# Altium PCB main.PcbDoc
Units mm, origin at the board's own origin, x right, y up, seen from the top; angles counter-clockwise.
Board outline 80 x 54.5 mm, 2 copper layers (Top Layer, Bottom Layer); 9 components, 7 nets, 32 pads, 2 vias.
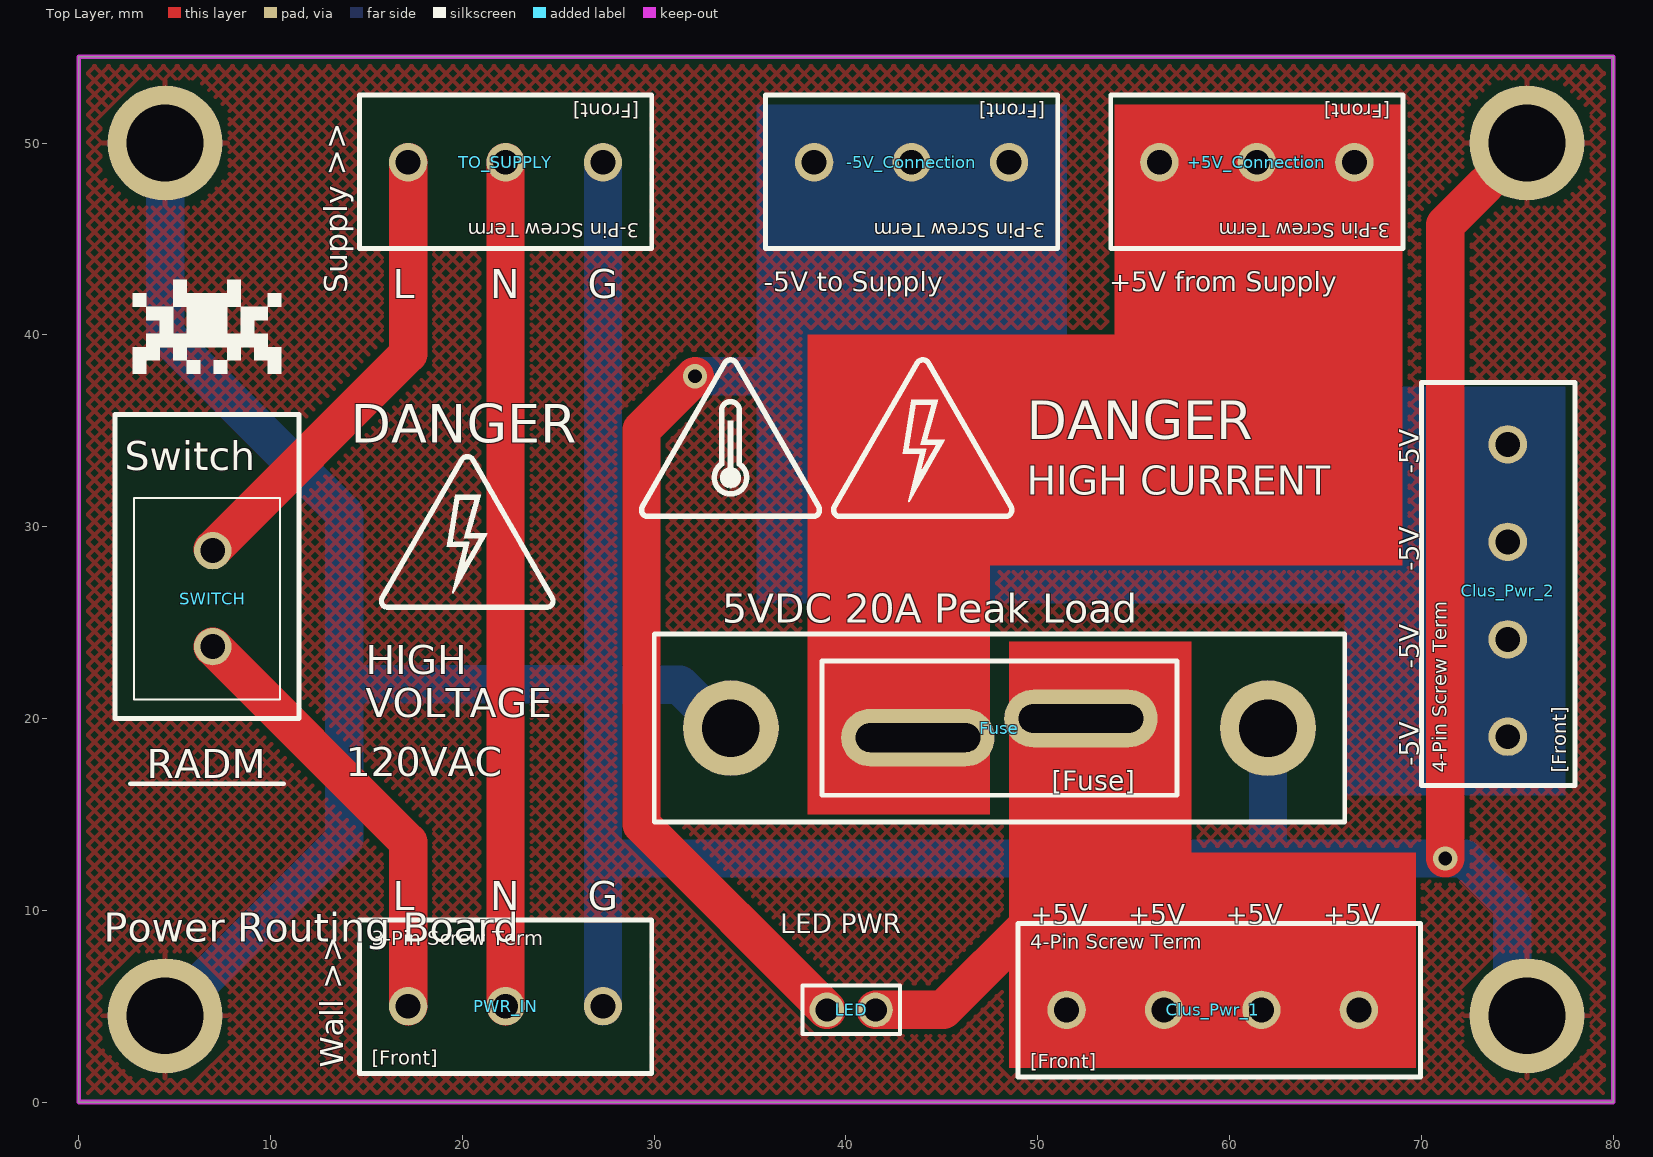
[diagram p0: Top Layer view]
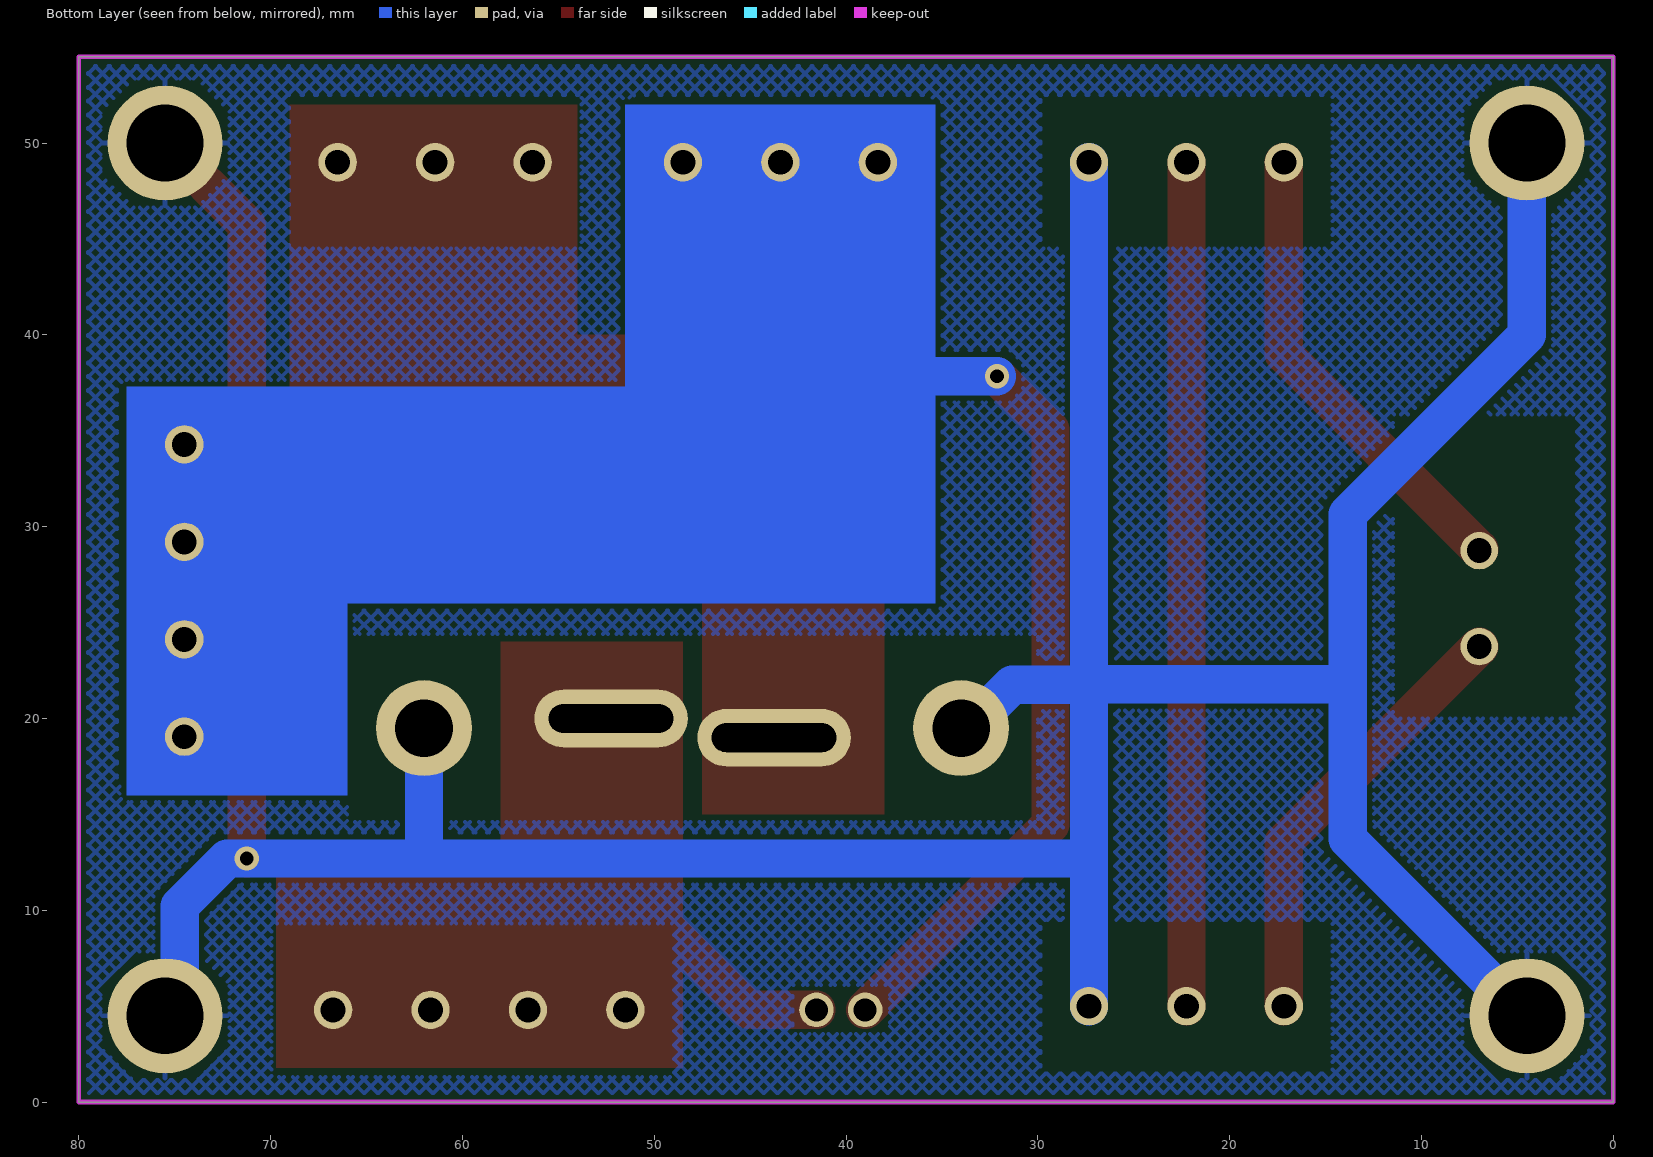
[diagram p1: Bottom Layer view, seen from below]

## Layer stack, top to bottom
Top Solder: solder mask 0.0102, Solder Resist, Dk 3.5
Top Layer: signal copper 0.0356
Dielectric 1: dielectric 0.32, FR-4, Dk 4.8
Bottom Layer: signal copper 0.0356
Bottom Solder: solder mask 0.0102, Solder Resist, Dk 3.5

## Board outline
0,0 0,54.5 80,54.5 80,0

## Design rules (kind name [scope] priority, off if disabled: settings)
Clearance [All] p1: gap=0.254 ignorepadtopadclearanceinfootprint=FALSE except(0: Arc-Hole Track-Hole SMDPad-Hole THPad-Hole Via-Hole Fill-Hole Poly-Hole Region-Hole Text-Hole)
PolygonConnect [All] p1: connectstyle=Relief reliefconductorwidth=0.254 reliefentries=4 polygonreliefangle="90 Angle" airgapwidth=0.254
RoutingVias [All] p1: holewidth=0.711 width=1.27 viastyle="Through Hole" minholewidth=0.711 minwidth=1.27 maxholewidth=0.711 maxwidth=1.27
SolderMaskExpansion [All] p1: expansion=0.102 istentingtop=FALSE
Width [All] p1: maxlimit=10 minlimit=1 preferedwidth=2
30 further rules are at their usual default settings.

## Components (designator, comment, footprint, x,y, rotation, side; value= is the part's Value field where it differs from the comment)
+5V_Connection "3pin Screw Terminal" "3pin Screw Terminal" 66.5,49 r180 top
-5V_Connection "3pin Screw Terminal" "3pin Screw Terminal" 48.5,49 r180 top
Clus_Pwr_1 "4pin Screw Terminal" "4pin Screw Terminal" 51.5,4.814 r0 top
Clus_Pwr_2 "4pin Screw Terminal" "4pin Screw Terminal" 74.5,19.05 r90 top
Fuse "Blade Fuse" "Blade Fuse [Standard]" 48,19.5 r0 top
LED "JST Female 2 Pin" "JST FEMALE 2PIN" 39,4.814 r0 top
PWR_IN "3pin Screw Terminal" "3pin Screw Terminal" 17.17,5 r0 top
SWITCH "Screw Terminal" TB00250002BE 6.985,23.749 r90 top
TO_SUPPLY "3pin Screw Terminal" "3pin Screw Terminal" 27.33,49 r180 top

## Footprints (in the part's own frame and the unit in brackets; to place one, negate y for a bottom-side part, rotate by r counter-clockwise, add the part's x,y. Pads: shape width x height; smd on the part's side, far side on the other; paste and mask are expansions set on the pad)
"3pin Screw Terminal" [mm]
  round 2 hole 1.3: 1(0,0) 2(5.08,0) 3(10.16,0)
  silkscreen extent -2.54,-3.5 12.7,4.5, body extent -2.55,-4 12.6,4, height 10.5
"4pin Screw Terminal" [mm]
  round 2 hole 1.3: 1(0,0) 2(5.08,0) 3(10.16,0) 4(15.24,0)
  silkscreen extent -2.54,-3.5 18.46,4.5, body extent -2.95,-3.5 17.75,4.1, height 9.99
"Blade Fuse [Standard]" [mm]
  oval 8x3 hole 1.5 slot 6.5 at 0 deg: 1(-4.25,-0.5) 2(4.25,0.5)
  round 5 hole 3: X(-14,0) X(14,0)
  silkscreen extent -18,-4.9 18,4.9, body extent -18.5,-5 18.5,5, height 16.5
"JST FEMALE 2PIN" [mm]
  round 1.8 hole 1.2: 1(0,0) 2(2.54,0)
  silkscreen extent -1.27,-1.27 3.81,1.27, body extent -2.4,-2.28 4.94,3.47, height 7.88
TB00250002BE [mm]
  round 1.95 hole 1.3: 1(0,0) 2(5,0)
  silkscreen extent -2.75,-3.5 7.75,4.1, body extent -2.51,-4.08 7.99,3.52, height 9.99

## Part data
Fuse: "Standard Fuse Socket", Capacity=20A
SWITCH: "Connector", Arrow Part Number=TB002-500-02BE, Manufacturer_Name="CUI Devices", Mouser Part Number=490-TB002-500-02BE, Arrow Price/Stock=https://www.arrow.com/en/products/tb002-500-02be/cui-devices?region=nac, Datasheet Link=https://eu.mouser.com/datasheet/2/670/tb002_500-1550579.pdf, Height=10.4mm, Manufacturer_Part_Number=TB002-500-02BE, Mouser Price/Stock=https://www.mouser.co.uk/ProductDetail/CUI-Devices/TB002-500-02BE?qs=vLWxofP3U2x9716kcgva%2Fw%3D%3D

## Free pads (board coordinates)
  round 6 hole 4: X(4.5,4.5) X(4.5,50) X(75.5,4.5) X(75.5,50)

## Via types
v1: diameter 1.27, hole 0.711, Top Layer to Bottom Layer, 2 vias

## Nets (pads, with @x,y where several pads share a name; then routed paths per layer and width w, separated by ;. In a path a pad name is that pad's centre, name@x,y a point inside that pad or via, vN(x,y) a via of type N, cw(c..) or ccw(c..) an arc to the next point about the centre after c; other vN are vias at no path point)
+5V: Clus_Pwr_1.1 Clus_Pwr_1.2 Clus_Pwr_1.3 Clus_Pwr_1.4 Fuse.2 LED.2 | length 10.2
  Top Layer w2: LED.2 45.073,4.814 49.784,9.525
+5V_unfused: +5V_Connection.1 +5V_Connection.2 +5V_Connection.3 Fuse.1
-5V: -5V_Connection.1 -5V_Connection.2 -5V_Connection.3 Clus_Pwr_2.1 Clus_Pwr_2.2 Clus_Pwr_2.3 Clus_Pwr_2.4 LED.1 | length 43.1
  Top Layer w2: v1(32.131,37.846) 29.337,35.052 29.337,14.477 LED.1
  Bottom Layer w2: v1(32.131,37.846) 37.084,37.846
GND: pad.X PWR_IN.3 TO_SUPPLY.1 | length 218.4
  Top Layer w2: v1(71.247,12.7) 71.247,45.747 pad.X@75.5,50
  Bottom Layer w2: pad.X@4.5,50 4.5,40 13.843,30.657 13.843,21.78 ; pad.X@4.627,4.5 13.843,13.716 13.843,21.78 ; PWR_IN.3 27.33,12.7 ; TO_SUPPLY.1 27.33,21.756 ; 33.584,19.5 31.328,21.756 27.33,21.756 ; 62,19.5 62,13.184 62.484,12.7 ; pad.X@75.5,4.5 74.735,5.265 74.735,10.228 72.263,12.7 62.484,12.7 ; 13.843,21.78 27.305,21.78 27.33,21.756 ; 27.33,12.7 62.484,12.7 ; 27.33,12.7 27.33,21.756
Live: PWR_IN.1 SWITCH.1 | length 23
  Top Layer w2: SWITCH.1 17.17,13.564 PWR_IN.1
Neutral: PWR_IN.2 TO_SUPPLY.2 | length 44
  Top Layer w2: PWR_IN.2 TO_SUPPLY.2
Switched_Live: SWITCH.2 TO_SUPPLY.3 | length 24.4
  Top Layer w2: SWITCH.2@6.985,28.815 17.17,39 TO_SUPPLY.3
pads on no net: Fuse.X

## Polygon pours and split planes (outlines as drawn)
GND on Top Layer "NONET_L01_P-001" (hatched 45Degree grid 0.508 track 0.203, pour order 0): 0,0 80,0 80,54.5 0,54.5
GND on Bottom Layer "NONET_L01_P-001" (hatched 45Degree grid 0.508 track 0.203, pour order 1): 0,54.5 80,54.5 80,0 0,0

## Keep-outs
Keep-Out Layer:
  the board outline again, w0.254

## Other copper
Top Layer:
  pour cut-out: 14.63,9.5 29.87,9.5 29.87,1.5 14.63,1.5
  pour cut-out: 37.719,6.096 42.799,6.096 42.799,3.556 37.719,3.556
  pour cut-out: 30,24.4 66,24.4 66,14.6 30,14.6
  pour cut-out: 69.96,9.313 69.96,1.314 48.96,1.314 48.96,9.313
  pour cut-out: 70,37.51 78,37.51 78,16.51 70,16.51
  pour cut-out: 53.8,52.5 69.04,52.5 69.04,44.5 53.8,44.5
  pour cut-out: 14.63,52.5 29.87,52.5 29.87,44.5 14.63,44.5
  pour cut-out: 35.8,44.5 35.8,52.5 51.04,52.5 51.04,44.5
  pour cut-out: 1.885,20 11.485,20 11.485,35.845 1.885,35.845
  region net +5V: 48.5,24 58,24 58,13 69.7,13 69.7,1.8 48.5,1.8
  region net +5V_unfused: 54,52 69,52 69,37 69,28 47.5,28 47.5,15 38,15 38,40 54,40
Bottom Layer:
  pour cut-out: 14.63,9.5 29.87,9.5 29.87,1.5 14.63,1.5
  pour cut-out: 42.799,6.096 42.799,3.556 37.719,3.556 37.719,6.096
  pour cut-out: 30,24.4 30,14.6 66,14.6 66,24.4
  pour cut-out: 69.96,9.313 69.96,1.314 48.96,1.314 48.96,9.313
  pour cut-out: 70,37.51 78,37.51 78,16.51 70,16.51
  pour cut-out: 53.8,52.5 69.04,52.5 69.04,44.5 53.8,44.5
  pour cut-out: 35.8,52.5 51.04,52.5 51.04,44.5 35.8,44.5
  pour cut-out: 14.63,52.5 29.87,52.5 29.87,44.5 14.63,44.5
  pour cut-out: 1.885,20 1.885,35.845 11.485,35.845 11.485,20
  region net -5V: 35.34,52 51.5,52 51.5,37.29 77.5,37.29 77.5,16 66,16 66,26 35.34,26

## Silkscreen, mask and mechanical layers (free items; w line width, h text height)
Top Overlay:
  drawing of 17 lines, arcs and shapes, not listed
  text "-5V to Supply" at 35.722,42.267 h1
  text "+5V from Supply" at 53.722,42.267 h1
  text "Supply >>" at 14,42.164 h1.2 r90
  text "L" at 16.37,41.9 h1.5
  text "N" at 21.45,41.9 h1.5
  text "G" at 26.53,41.9 h1.5
  text "DANGER" at 49.413,34.565 h2
  text "DANGER" at 14.185,34.372 h2
  text "Switch" at 2.386,32.95 h1.5
  text "-5V" at 69.858,32.757 h1 r90
  text "HIGH CURRENT" at 49.413,31.675 h1.5
  text "-5V" at 69.858,27.677 h1 r90
  text "5VDC 20A Peak Load" at 33.547,25 h1.5
  text "-5V" at 69.858,22.597 h1 r90
  text "HIGH / VOLTAGE" at 14.952,20.063 h1.5
  text "-5V" at 69.858,17.517 h1 r90
  text "120VAC" at 13.911,17 h1.5
  text "RADM" at 3.536,16.884 h1.5
  text "L" at 16.37,10 h1.5
  text "N" at 21.45,10 h1.5
  text "G" at 26.53,10 h1.5
  text "+5V" at 49.634,9.29 h1
  text "+5V" at 54.714,9.29 h1
  text "+5V" at 59.794,9.29 h1
  text "+5V" at 64.874,9.29 h1
  text "LED PWR" at 36.572,8.8 h1
  text "Power Routing Board" at 1.303,8.373 h1.5
  text "Wall >>" at 13.8,1.782 h1.2 r90

## Text inside footprints (layer, text, board x,y; h text height)
+5V_Connection: Top Overlay "3-Pin Screw Term" at 68.382,45.819 h0.75 r180; Top Overlay "[Front]" at 68.382,52.042 h0.75 r180
-5V_Connection: Top Overlay "[Front]" at 50.382,52.042 h0.75 r180; Top Overlay "3-Pin Screw Term" at 50.382,45.819 h0.75 r180
Clus_Pwr_1: Top Overlay "[Front]" at 49.618,1.772 h0.75; Top Overlay "4-Pin Screw Term" at 49.618,7.995 h0.75
Clus_Pwr_2: Top Overlay "[Front]" at 77.542,17.168 h0.75 r90; Top Overlay "4-Pin Screw Term" at 71.319,17.168 h0.75 r90
Fuse: Top Overlay "[Fuse]" at 50.738,16.25 h1
PWR_IN: Top Overlay "3-Pin Screw Term" at 15.288,8.181 h0.75; Top Overlay "[Front]" at 15.288,1.958 h0.75
TO_SUPPLY: Top Overlay "3-Pin Screw Term" at 29.212,45.819 h0.75 r180; Top Overlay "[Front]" at 29.212,52.042 h0.75 r180